# Altium PCB tscnew.PcbDoc
Units mm, origin at the board's own origin, x right, y up, seen from the top; angles counter-clockwise.
Board outline 151 x 86.38 mm, 2 copper layers (Top Layer, Bottom Layer); 69 components, 59 nets, 239 pads, 0 vias.
Unrouted connection lines stored in the file: 14.
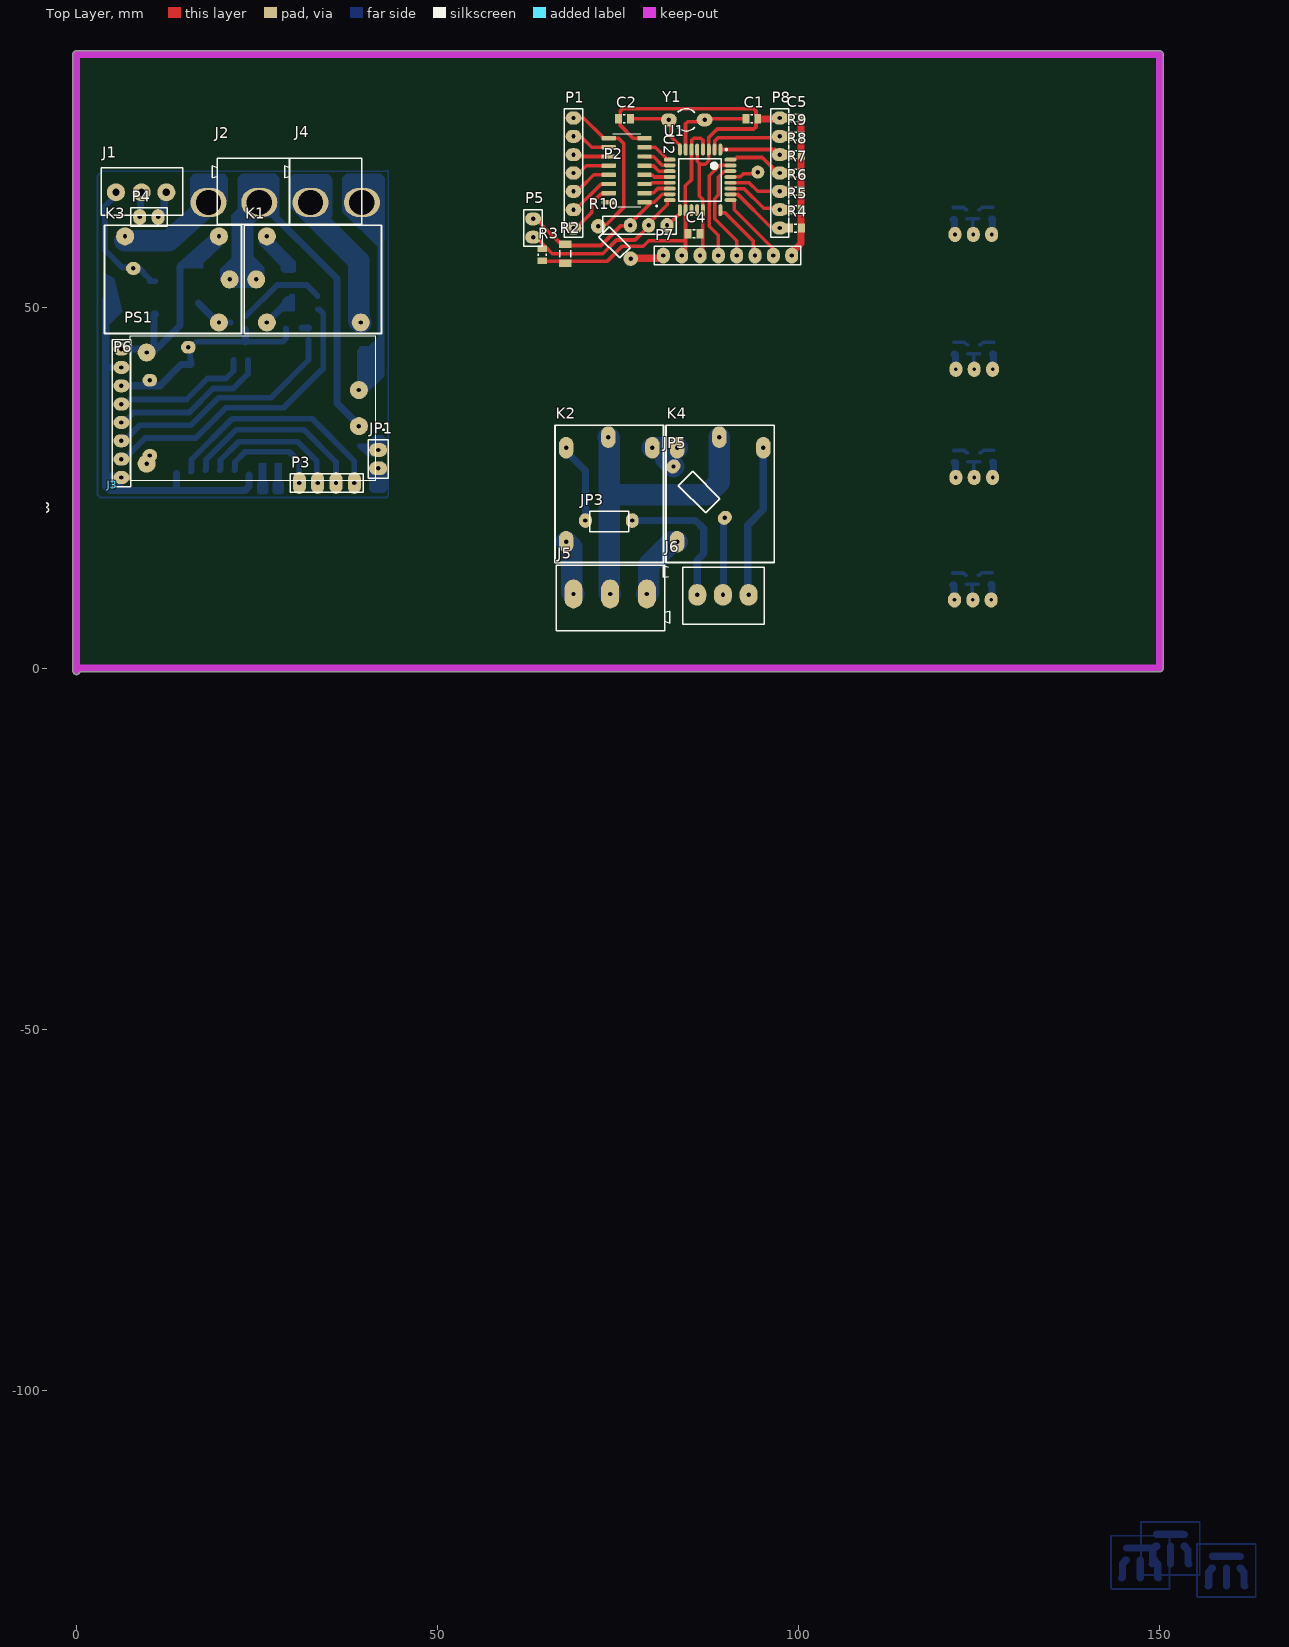
[diagram p0: Top Layer view]
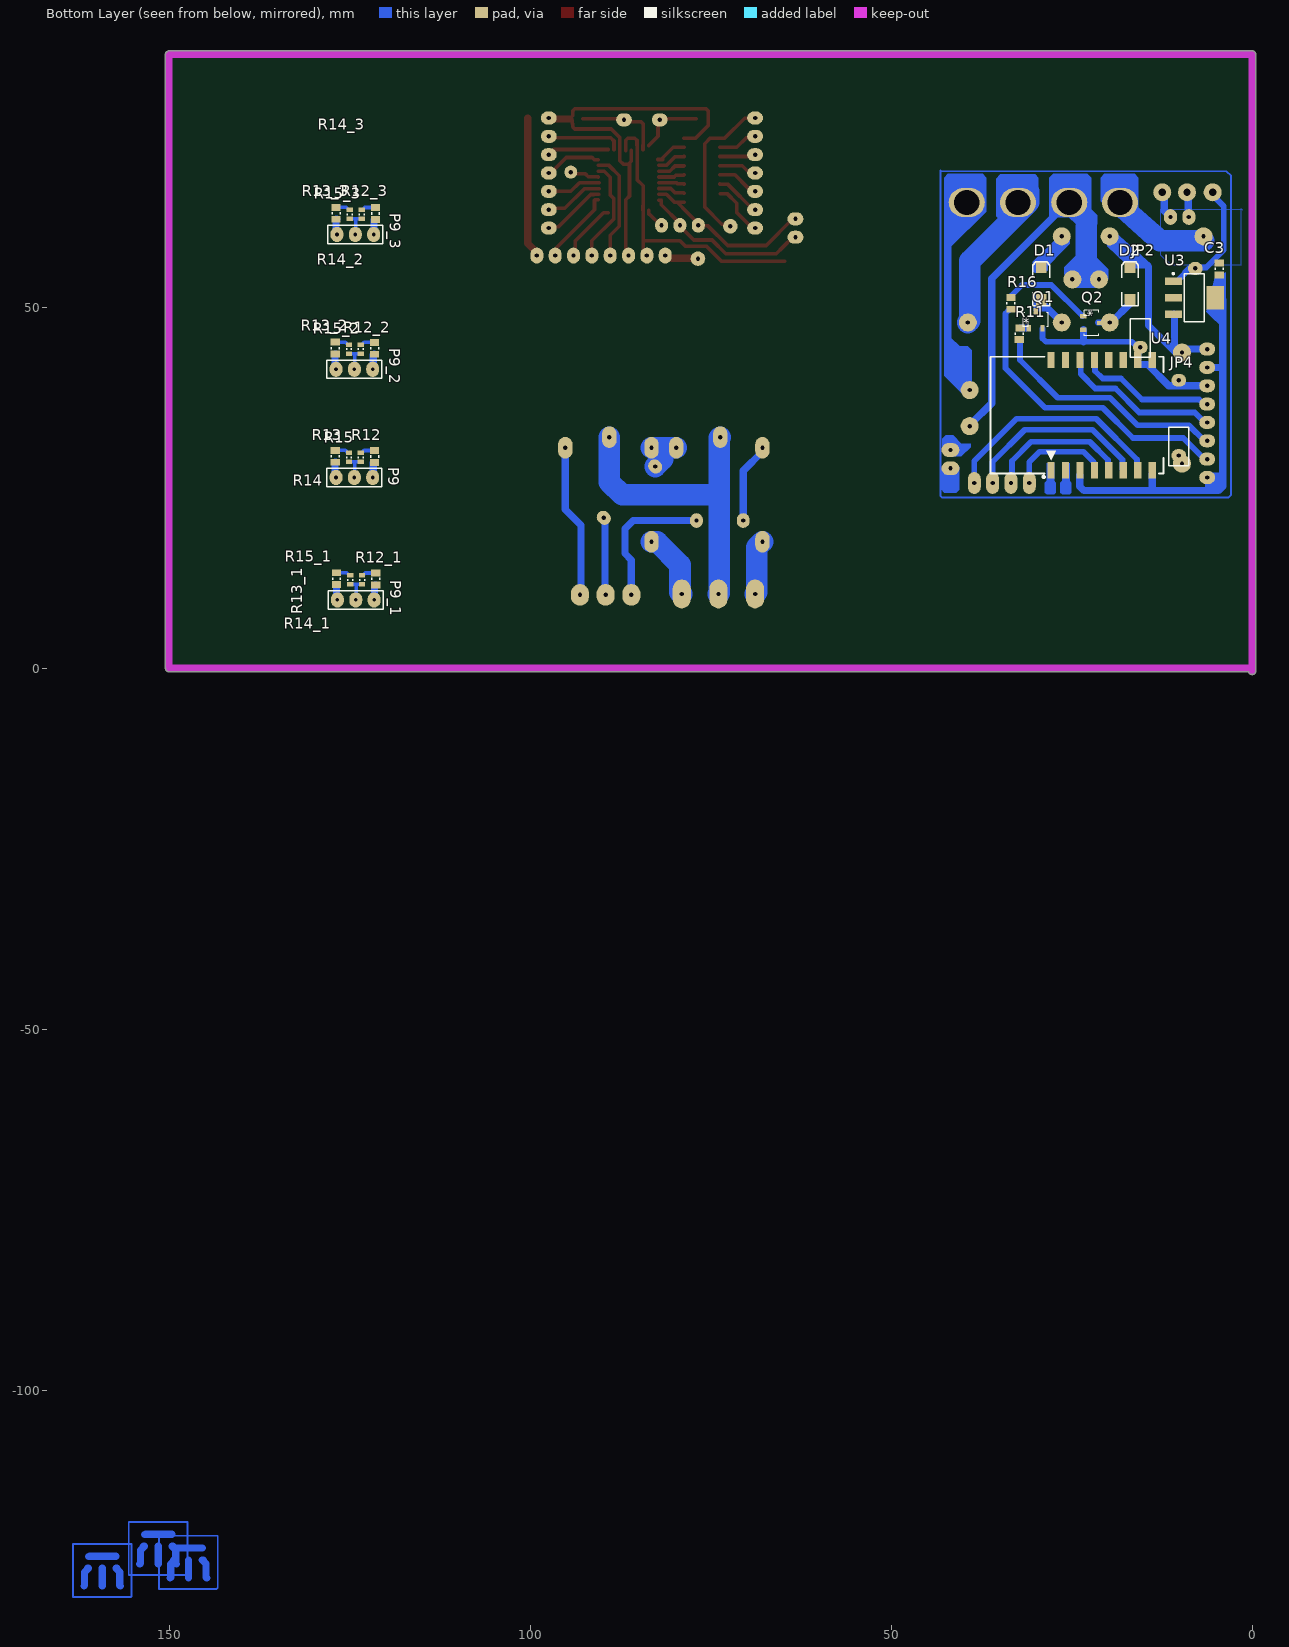
[diagram p1: Bottom Layer view, seen from below]
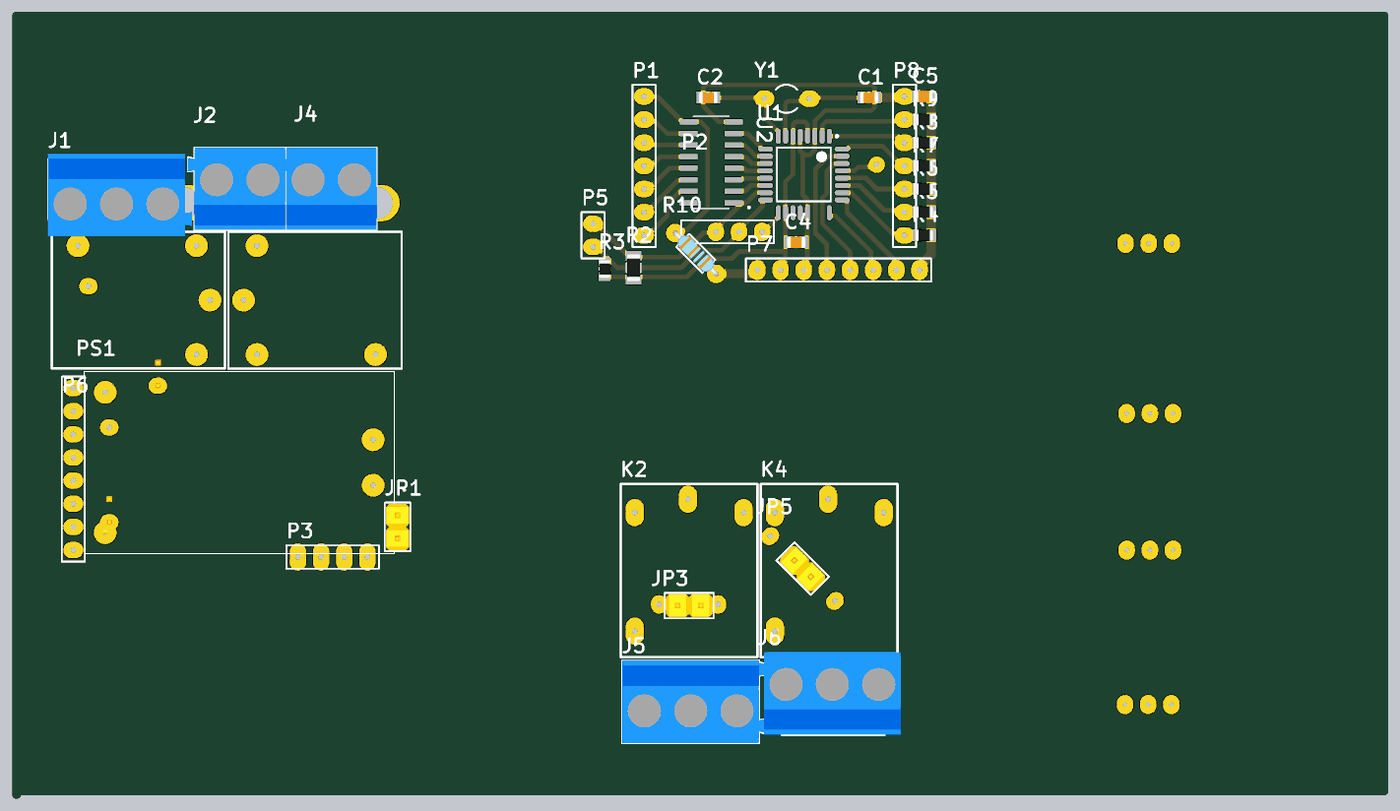
[diagram p2: 3D render of the assembled board from above, using the file's embedded part models]
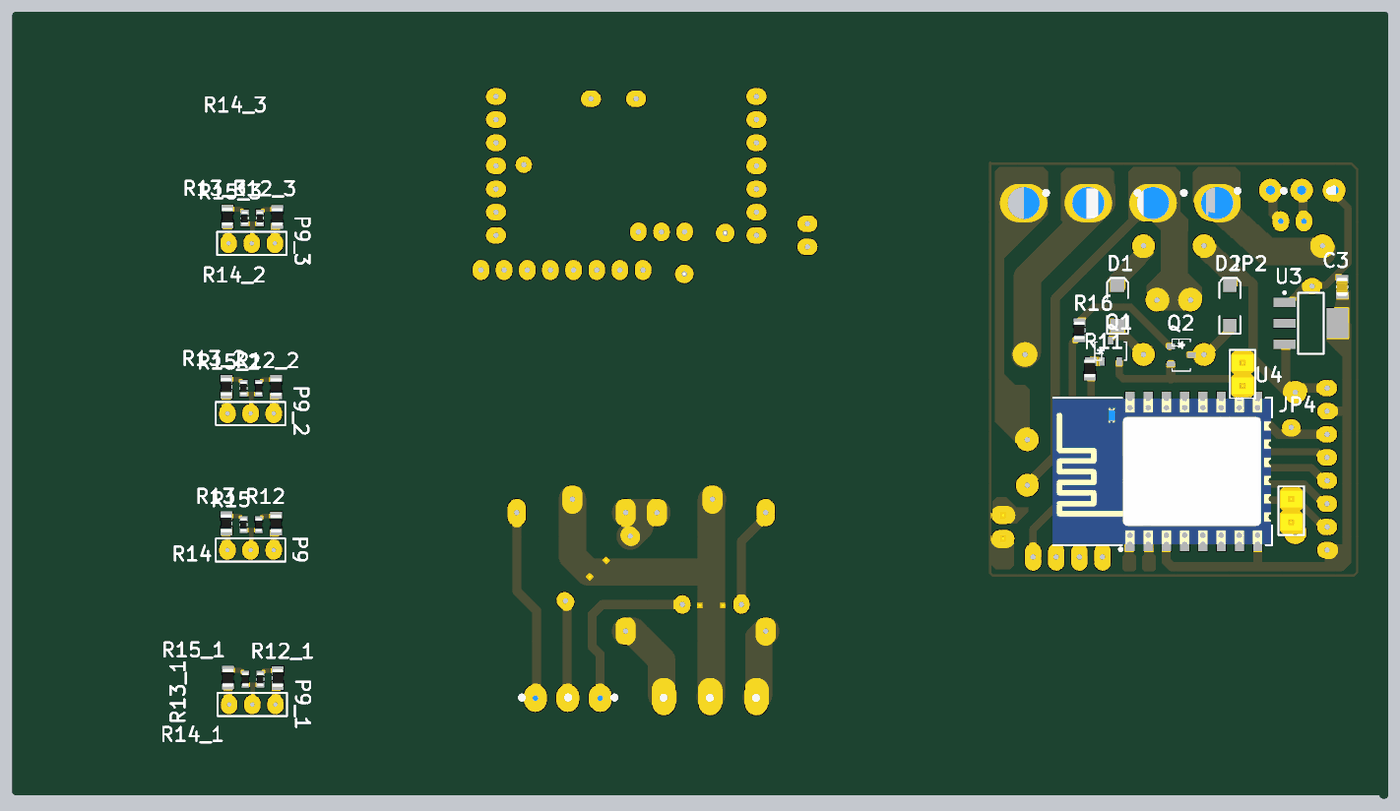
[diagram p3: 3D render of the assembled board from below, using the file's embedded part models]

## Layer stack, top to bottom
Top Solder: solder mask 0.0102, Solder Resist, Dk 3.5
Top Layer: signal copper 0.0356
Dielectric 1: dielectric 0.32, FR-4, Dk 4.8
Bottom Layer: signal copper 0.0356
Bottom Solder: solder mask 0.0102, Solder Resist, Dk 3.5

## Board outline
-0.5,-0.381 -0.5,85 cw(c0,85) 0,85.5 150,85.5 cw(c150,85) 150.5,85 150.5,0 cw(c150,0) 150,-0.5 0.486,-0.5 cw(c0,-0.381)

## Design rules (kind name [scope] priority, off if disabled: settings)
Clearance Clearance_1 [InPolygon] p1: gap=0.8 ignorepadtopadclearanceinfootprint=FALSE
Clearance [All] p2: gap=0.254 ignorepadtopadclearanceinfootprint=FALSE except(0: Arc-Hole Track-Hole SMDPad-Hole THPad-Hole Via-Hole Fill-Hole Poly-Hole Region-Hole Text-Hole)
PolygonConnect [All] p1: connectstyle=Relief reliefconductorwidth=0.254 reliefentries=4 polygonreliefangle="90 Angle" airgapwidth=0.254
RoomDefinition tscnew [InComponentClass('tscnew')] p1: confinementstyle=ConfineIn formatcopy=TRUE lockcomponents=FALSE outline 144.907,-4.953 247.904,-4.953 247.904,23.114 144.907,23.114
RoutingLayers [All] p1: top layer_v5=FALSE bottom layer_v5=TRUE
RoutingVias [All] p1: holewidth=0.711 width=2.5 viastyle="Through Hole" minholewidth=0.711 minwidth=1.27 maxholewidth=0.711 maxwidth=2
SolderMaskExpansion [All] p1: expansion=0.102 istentingtop=FALSE
Width [All] p1: maxlimit=3 minlimit=0.5 preferedwidth=1
29 further rules are at their usual default settings.

## Components (designator, comment, footprint, x,y, rotation, side; value= is the part's Value field where it differs from the comment)
C1 "=Value" "CAP 0805" 93.472,76.073 r180 top
C2 "=Value" "CAP 0805" 75.946,76.073 r0 top
C3 "=Value" "CAP 0805" 4.572,55.372 r90 bottom
C4 "=Value" "CAP 0805" 85.598,60.198 r0 top
C5 "=Value" "CAP 0805" 99.441,76.2 r180 top
D1 "D Tunnel1" 3.2X1.6X1.1 29.21,53.086 r90 bottom
D2 "D Tunnel1" 3.2X1.6X1.1 16.891,53.086 r90 bottom
J1 "TBlock-3" "KF300-3 PIN"#1 16.002,65.913 r270 top
J2 "TBlock-2" "KF300-2 PIN"#1 21.971,65.532 r90 top
J3 "TBlock-4" "KF300-4 PIN" 4.953,25.4 r180 top
J4 "TBlock-2" "KF300-2 PIN"#2 32.004,65.532 r90 top
J5 "TBlock-3" "KF300-3 PIN"#2 78.994,10.287 r270 top
J6 "TBlock-3" "KF300-3 PIN"#3 84.455,10.16 r90 top
JP1 "Jumper" "Header 2X1"#1 41.783,28.956 r90 top
JP2 "Jumper" "Header 2X1"#2 15.494,45.72 r90 bottom
JP3 "Jumper" "Header 2X1"#3 73.787,20.32 r0 top
JP4 "Jumper" "Header 2X1"#4 10.16,30.734 r90 bottom
JP5 "Jumper" "Header 2X1"#5 86.233,24.384 r315 top
K1 "Relay-12vDC" Relays#1 23.241,61.341 r270 top
K2 "Relay-12vDC" Relays#2 81.28,33.655 r180 top
K3 "Relay-12vDC" Relays#1 22.86,46.355 r90 top
K4 "Relay-12vDC" Relays#2 96.647,33.655 r180 top
P1 "Header 7" HDR1X7 68.834,76.2 r270 top
P2 "Header 4" HDR1X4#1 81.788,61.341 r180 top
P3 "Header 4" HDR1X4#2 38.481,25.654 r180 top
P4 "Header 2" HDR1X2 8.763,62.492 r0 top
P5 "Header 2" HDR1X2 63.246,62.23 r270 top
P6 "Header 8" HDR1X8 6.223,26.416 r90 top
P7 "Header 8" HDR1X8 99.06,57.15 r180 top
P8 "Header 7" HDR1X7 97.409,60.96 r90 top
P9 "Header 3" HDR1X3 126.873,26.416 r180 bottom
P9_1 "Header 3" HDR1X3 126.682,9.461 r180 bottom (schematic designator P9)
P9_2 "Header 3" HDR1X3 126.873,41.402 r180 bottom (schematic designator P9)
P9_3 "Header 3" HDR1X3 126.746,60.071 r180 bottom (schematic designator P9)
PS1 "HLK-PM01" HLKPM01 39.116,33.528 r180 top
Q1 "MMBT3904-TP" SOT23-3 31.242,48.26 r180 bottom
Q2 "MMBT3904-TP" SOT23-3 22.218,49.083 r270 bottom
R2 "10K" "RES 1206 (3216X08L)" 67.691,57.404 r90 top
R3 "10K" "RES 0805 (2012X06L)"#1 64.516,57.277 r90 top
R4 "10K" "RES 0805 (2012X06L)"#1 99.568,60.96 r180 top
R5 "10K" "RES 0805 (2012X06L)"#1 99.568,63.5 r180 top
R6 "10K" "RES 0805 (2012X06L)"#1 99.568,66.04 r180 top
R7 "10K" "RES 0805 (2012X06L)"#1 99.568,68.58 r180 top
R8 "10K" "RES 0805 (2012X06L)"#1 99.568,71.12 r180 top
R9 "10K" "RES 0805 (2012X06L)"#1 99.568,73.66 r180 top
R10 "10K" Res-(1/4) 74.508,58.969 r135 top
R11 "10K" "RES 0805 (2012X06L)"#2 32.258,46.355 r90 bottom
R12 "10K" "RES 0805 (2012X06L)"#1 121.539,29.337 r90 bottom
R12_1 "10K" "RES 0805 (2012X06L)"#1 121.349,12.383 r90 bottom (schematic designator R12)
R12_2 "10K" "RES 0805 (2012X06L)"#1 121.539,44.323 r90 bottom (schematic designator R12)
R12_3 "10K" "RES 0805 (2012X06L)"#1 121.412,62.992 r90 bottom (schematic designator R12)
R13 "10K" "RES 0805 (2012X06L)"#1 127,29.337 r270 bottom
R13_1 "10K" "RES 0805 (2012X06L)"#1 126.809,12.383 r270 bottom (schematic designator R13)
R13_2 "10K" "RES 0805 (2012X06L)"#1 127,44.323 r270 bottom (schematic designator R13)
R13_3 "10K" "RES 0805 (2012X06L)"#1 126.873,62.992 r270 bottom (schematic designator R13)
R14 "10K" "RES 0603 (1608X06L)" 123.444,29.21 r90 bottom
R14_1 "10K" "RES 0603 (1608X06L)" 123.253,12.255 r90 bottom (schematic designator R14)
R14_2 "10K" "RES 0603 (1608X06L)" 123.444,44.196 r90 bottom (schematic designator R14)
R14_3 "10K" "RES 0603 (1608X06L)" 123.317,62.865 r90 bottom (schematic designator R14)
R15 "10K" "RES 0603 (1608X06L)" 125.095,29.21 r90 bottom
R15_1 "10K" "RES 0603 (1608X06L)" 124.904,12.255 r90 bottom (schematic designator R15)
R15_2 "10K" "RES 0603 (1608X06L)" 125.095,44.196 r90 bottom (schematic designator R15)
R15_3 "10K" "RES 0603 (1608X06L)" 124.968,62.865 r90 bottom (schematic designator R15)
R16 "10K" "RES 0805 (2012X06L)"#1 33.401,50.546 r90 bottom
U1 "ATmega8-16AC" 32A_N 86.369,67.634 r270 top
U2 "ULN2003ADRG4" SOIC127P600X175-16N 76.2,68.961 r180 top
U3 "LM1117MP-3.3" MP04A_N 8.001,51.308 r180 bottom
U4 "ESP_12_E" ESP_12_E 27.845,27.047 r90 bottom
Y1 "XTAL" R38 84.455,75.946 r90 top

## Footprints (in the part's own frame and the unit in brackets; to place one, negate y for a bottom-side part, rotate by r counter-clockwise, add the part's x,y. Pads: shape width x height; smd on the part's side, far side on the other; paste and mask are expansions set on the pad)
3.2X1.6X1.1 [mm] "SMT LED; 2 Flat Leads"
  rect 1.5x1.5 smd: 1(-2.032,0) 2(2.413,0)
  silkscreen extent -2.9,-1.15 3.2,1.15
32A_N [mm] "Thin QFP, 32-Leads, Body 7x7mm, Pitch 0.8mm, IPC Medium Density"
  oval 1.65x0.55 smd: 1(-4.2,2.8) 2(-4.2,2) 3(-4.2,1.2) 4(-4.2,0.4) 5(-4.2,-0.4) 6(-4.2,-1.2) 7(-4.2,-2) 8(-4.2,-2.8) 17(4.2,-2.8) 18(4.2,-2) 19(4.2,-1.2) 20(4.2,-0.4) 21(4.2,0.4) 24(4.2,2.8)
  oval 0.55x1.65 smd: 9(-2.8,-4.2) 10(-2,-4.2) 11(-1.2,-4.2) 12(-0.4,-4.2) 13(0.4,-4.2) 14(1.2,-4.2) 15(2,-4.2) 16(2.8,-4.2) 25(2.8,4.2) 26(2,4.2) 27(1.2,4.2) 28(0.4,4.2) 29(-0.4,4.2) 30(-1.2,4.2) 31(-2,4.2) 32(-2.8,4.2)
  silkscreen extent -4.32,-2.95 2.95,3.75, body extent -3.5,-3.5 3.5,3.5, height 1.2
"CAP 0805" [mm]
  rect 0.95x1.3 smd: 1(-0.889,0) 2(0.761,0)
  silkscreen extent -0.21,-0.55 0.09,0.55, body extent -1.08,-0.63 0.95,0.63, height 0.65
ESP_12_E [mm] "ESP-12 Wi-Fi Module by AI-Thinker"
  rect 2.25x1 smd: 1(0.375,0) 2(0.375,-2) 3(0.375,-4) 4(0.375,-6) 5(0.375,-8) 6(0.375,-10) 7(0.375,-12) 8(0.375,-14) 15(15.625,-14) 16(15.625,-12) 17(15.625,-10) 18(15.625,-8) 19(15.625,-6) 20(15.625,-4) 21(15.625,-2) 22(15.625,0)
  silkscreen extent -0.7,-15.57 16.08,8.37, body extent 0,-15.49 16,8.51, height 2.75
HDR1X2 [mm] "Connector; Header; 2 Position"
  oval 1.8x2.2 hole 0.6: 1(0,0) 2(2.54,0)
  silkscreen extent -1.27,-1.27 3.81,1.27
HDR1X3 [mm] "Connector; Header; 3 Position"
  oval 1.8x2.1 hole 0.5: 1(0,0) 2(2.54,0) 3(5.08,0)
  silkscreen extent -1.27,-1.27 6.35,1.27
HDR1X4#1 [mm] "Connector; Header; 4 Position"
  oval 1.8x2.032 hole 0.6: 1(0,0) 2(2.54,0) 3(5.08,0)
  round 1.8 hole 0.6: 4(-12.573,-7.366)
  silkscreen extent -1.27,-1.27 8.89,1.27
HDR1X4#2 [mm] "Connector; Header; 4 Position"
  oval 1.8x3 hole 0.6: 1(0,0) 2(2.54,0) 3(5.08,0) 4(7.62,0)
  silkscreen extent -1.27,-1.27 8.89,1.27
HDR1X7 [mm] "Connector; Header; 7 Position"
  oval 1.8x2.2 hole 0.6: 1(0,0) 2(2.54,0) 3(5.08,0) 4(7.62,0) 5(10.16,0) 6(12.7,0) 7(15.24,0)
  silkscreen extent -1.27,-1.27 16.51,1.27
HDR1X8 [mm] "Connector; Header; 8 Position"
  oval 1.8x2.2 hole 0.6: 1(0,0) 2(2.54,0) 3(5.08,0) 4(7.62,0) 5(10.16,0) 6(12.7,0) 7(15.24,0) 8(17.78,0)
  silkscreen extent -1.27,-1.27 19.05,1.27
"Header 2X1"#1 [mm]
  oval 1.9x2.5 hole 0.6: 1(-1.27,0) 2(1.27,0)
  silkscreen extent -2.67,-1.4 2.67,1.4, body extent -2.54,-1.27 2.54,1.27, height 9.5
"Header 2X1"#2 [mm]
  oval 1.778x2.032 hole 0.6: 1(-1.27,0) 2(9.652,-7.62)
  silkscreen extent -2.67,-1.4 2.67,1.4, body extent -2.54,-1.27 2.54,1.27, height 9.5
"Header 2X1"#3 [mm]
  oval 1.778x2.032 hole 0.6: 1(-3.302,0.127) 2(3.175,0.127)
  silkscreen extent -2.67,-1.4 2.67,1.4, body extent -2.54,-1.27 2.54,1.27, height 9.5
"Header 2X1"#4 [mm]
  oval 1.778x2.032 hole 0.6: 1(-1.27,0) 2(9.144,0)
  silkscreen extent -2.67,-1.4 2.67,1.4, body extent -2.54,-1.27 2.54,1.27, height 9.5
"Header 2X1"#5 [mm]
  oval 1.778x2.032 hole 0.6: 1(-5.029,0) 2(5.029,0)
  silkscreen extent -2.67,-1.4 2.67,1.4, body extent -2.54,-1.27 2.54,1.27, height 9.5
HLKPM01 [mm]
  round 2.5 hole 0.6: 1(0,0) 2(0,-5) 3(29.4,5.2) 4(29.4,-10.2)
  silkscreen extent -3.5,-12.5 31.7,7.5
"KF300-2 PIN"#1 [mm]
  oval 4x5 hole 3.5: 1(-1.032,3.683) 2(-1.032,-3.35)
  silkscreen extent -4.06,-7.49 5.08,3.18, body extent -3.99,-7.5 5.08,3.24, height 12.52
"KF300-2 PIN"#2 [mm]
  oval 4x5 hole 3.5: 1(-1.032,-0.417) 2(-1.032,-7.517)
  silkscreen extent -4.06,-7.49 5.08,3.18, body extent -3.99,-7.5 5.08,3.24, height 12.52
"KF300-3 PIN"#1 [mm]
  round 2.5 hole 1: 1(0,-3.556) 2(0,-6.985) 3(0,-10.541)
  silkscreen extent -3.43,-12.57 3.18,-1.27, body extent -4,-12.57 5.07,3.25, height 12.78
"KF300-3 PIN"#2 [mm]
  oval 4x2.5 hole 0.6: 1(0,0) 2(0,-5.08) 3(0,-10.16)
  silkscreen extent -4.06,-12.57 5.08,3.18, body extent -4,-12.57 5.07,3.25, height 12.78
"KF300-3 PIN"#3 [mm]
  oval 3x2.5 hole 0.6: 1(0,-1.524) 2(0,-5.08) 3(0,-8.636)
  silkscreen extent -4.06,-10.79 4.05,3.18, body extent -4,-12.57 5.07,3.25, height 12.78
"KF300-4 PIN" [mm]
MP04A_N [mm] "SOT223, 4-Leads, Body 6.5x3.5mm, Pitch 2.3mm, Lead Span 7mm, IPC Medium Density"
  rect 2.4x1 smd: 1(-2.9,2.3) 2(-2.9,0) 3(-2.9,-2.3)
  rect 2.4x3.3 smd: 4(2.9,0)
  silkscreen extent -3.03,-3.35 1.4,3.47, body extent -1.85,-3.35 1.85,3.35, height 1.8
R38 [mm] "Crystal, Thru-Hole; 2 Leads; Body 3.1 x 8.2 mm (Dia.xH)"
  oval 1.8x2.2 hole 0.6: 1(0,2.413) 2(0,-2.54)
  silkscreen extent -1.55,-1.19 1.55,1.17
Relays#1 [mm]
  round 2.5 hole 0.6: 1(7.493,1.651) 3(13.462,16.129) 4(1.524,3.127) 5(13.462,3.127)
  silkscreen extent 0,0 15,19
Relays#2 [mm]
  oval 2x3 hole 0.6: 1(7.62,1.651) 3(13.462,16.129) 4(1.524,3.127) 5(13.462,3.127)
  silkscreen extent 0,0 15,19
"RES 0603 (1608X06L)" [mm] "Chip Resistor, 2-Leads, Body 1.6x0.8mm, IPC High Density _ (0.063W)"
  rect 0.6x0.85 smd: 1(-0.635,0) 2(0.609,0)
  silkscreen extent -0.11,-0.33 0.09,0.33, body extent -0.77,-0.38 0.75,0.38, height 0.45
"RES 0805 (2012X06L)"#1 [mm] "Chip Resistor, 2-Leads, Body 2.0x1.3mm, IPC High Density _ (0.100 W)"
  rect 0.95x1.3 smd: 1(-0.838,0) 2(0.812,0)
  silkscreen extent -0.16,-0.55 0.14,0.55, body extent -1.03,-0.63 1,0.64, height 0.6
"RES 0805 (2012X06L)"#2 [mm] "Chip Resistor, 2-Leads, Body 2.0x1.3mm, IPC High Density _ (0.100 W)"
  rect 0.95x1.3 smd: 1(-0.838,0) 2(0.762,-0.127)
  silkscreen extent -0.16,-0.55 0.14,0.55, body extent -1.03,-0.63 1,0.64, height 0.6
"RES 1206 (3216X08L)" [mm] "Chip Resistor, 2-Leads, Body 3.2x1.6mm, IPC High Density _ (0.125 W)"
  rect 1.05x1.7 smd: 1(-1.295,0) 2(1.301,0)
  silkscreen extent -0.5,-0.75 0.5,0.75, body extent -1.52,-0.76 1.53,0.76, height 0.6
Res-(1/4) [mil]
  round 80 hole 23.62: 1(-125,0) 2(125,0)
  silkscreen extent -80,-40 80,40, body extent -135,-36 135,36, height 115
SOIC127P600X175-16N [mm]
  rrect25% 1.97x0.6 smd: 1(-2.475,4.445) 2(-2.475,3.175) 3(-2.475,1.905) 4(-2.475,0.635) 5(-2.475,-0.635) 6(-2.475,-1.905) 7(-2.475,-3.175) 8(-2.475,-4.445) 9(2.475,-4.445) 10(2.475,-3.175) 11(2.475,-1.905) 12(2.475,-0.635) 13(2.475,0.635) 14(2.475,1.905) 15(2.475,3.175) 16(2.475,4.445)
  silkscreen extent -4.25,-5.06 1.95,5.06
SOT23-3 [mm]
  rect 0.6x0.9 smd: 1(0.32,-1.15) 2(2.22,-1.15) 3(1.27,1.15)
  silkscreen extent -0.48,-1 3.02,1

## Part data
C1 C2 C3 C4 C5: library part Capacitor, "Capacitor"
D1 D2: "Tunnel Diode - RLC Model", LatestRevisionDate=17-Jul-2002, LatestRevisionNote="Re-released for DXP Platform.", PackageDescription="SM LED; 2 Flat Leads", PackageReference=3.2X1.6X1.1, PackageVersion=Feb-2002, Published=8-Jun-2000, Publisher="Altium Limited"
K1 K2 K3 K4: library part Relay-05vDC, "Relay-05vDC-240AC 5A", ComponentLinkURL=www.picpars.com, Designer="Seyed Mohsen Ghasemain"
P1 P8: "Header, 7-Pin", LatestRevisionDate=17-Jul-2002, LatestRevisionNote="Re-released for DXP Platform.", Publisher="Altium Limited"
P2 P3: "Header, 4-Pin", LatestRevisionDate=17-Jul-2002, LatestRevisionNote="Re-released for DXP Platform.", Publisher="Altium Limited"
P4 P5: "Header, 2-Pin", LatestRevisionDate=17-Jul-2002, LatestRevisionNote="Re-released for DXP Platform.", Publisher="Altium Limited"
P6 P7: "Header, 8-Pin", LatestRevisionDate=17-Jul-2002, LatestRevisionNote="Re-released for DXP Platform.", Publisher="Altium Limited"
P9 P9_1 P9_2 P9_3: "Header, 3-Pin", LatestRevisionDate=17-Jul-2002, LatestRevisionNote="Re-released for DXP Platform.", Publisher="Altium Limited"
PS1: "<b>Ultra-compact power module</b><p> Source: <a href=\"https://datasheet.lcsc.com/szlcsc/1906201102_HI-LINK-HLK-PM03_C209904.pdf\"> Datasheet </a>", Package="Package Analog Devices", Availability=Unavailable, MF=Hi-link, MP=hlk-pm01, Price=None, SnapEDA_Link=https://www.snapeda.com/parts/hlk-pm01/Hi-link/view-part/2875605/?ref=snap
Q1 Q2: "Bipolar _BJT_ Transistor NPN 40V 200mA 300MHz 350mW Surface Mount SOT-23", Package="SOT-23 Micro Commercial", Availability=Unavailable, MF="Micro Commercial", MP=MMBT3904-TP, Price=None, SnapEDA_Link=https://www.snapeda.com/parts/MMBT3904-TP/Micro%20Commercial/view-part/805928/?ref=snap
R2 R3 R4 R5 R6 R7 R8 R9 R10 R11 R12 R12_1 R12_2 R12_3 R13 R13_1 R13_2 R13_3 R14 R14_1 R14_2 R14_3 R15 R15_1 R15_2 R15_3 R16: library part Resistor, "Resistor", Power="1/4 W", Tolerance=5%
U1: "8-Bit AVR Microcontroller with 8K Bytes of In-System Programmable Flash Memory", Supplier Part Number 1=ATMEGA8-16AC-ND, Code_JEDEC=MS-026-ABA, ComponentLink1Description=Datasheet, ComponentLink1URL=http://www.atmel.com/dyn/resources/prod_documents/doc2486.pdf, ComponentLink2Description="Atmel.com Home", ComponentLink2URL=http://www.atmel.com, DatasheetVersion=2486H-AVR-09/02, LatestRevisionDate=16-Oct-2006, LatestRevisionNote="IPC-7351 Footprint Added.", PackageDescription="32-Lead, 7x7x1.0 mm Body, 0.8mm Lead Pitch, Thin Profile Plastic Quad Flat Package (TQFP)", PackageReference=32A, PackageVersion="revB, Oct-2001", Published=17-Sep-2003, Publisher="Altium Limited", Supplier 1=Digi-Key, Supplier 2=Mouser, Supplier Part Number 2=556-ATMEGA8-16AC
U2: "50-V, 7-ch darlington transistor array, -20C to 70C 16-SOIC -40 to 70", Package=None, Availability=Unavailable, MP=ULN2003ADRG4, Price=None
U3: "800mA Low-Dropout Linear Regulator", DigiKeyPartNumber=LM1117MP-3.3CT-ND, Manufacturer="National Semiconductor", PackageTopMarking=XYTT*N05A, PowerWise=N, Code_IPC=SOT223-4, Code_JEDEC=TO-261-AA, ComponentLink1Description="LM1117 Datasheet", ComponentLink1URL=http://www.national.com/ds/LM/LM1117.pdf, ComponentLink2Description="LM1117 Web Page", ComponentLink2URL=http://www.national.com/pf/LM/LM1117.html, ComponentLink3Description="MP04A Package Page", ComponentLink3URL=http://www.national.com/packaging/folders/mp04a.html, CompType="LDO IC", DatasheetVersion=Apr-2006, PackageDescription="Molded SOT-223, 6.50 x 3.56 x 1.6mm Body, 4 Lead, 2.3mm Pitch", PackageReference=MP04A, PackageVersion="revB, Apr-2003", PartNumber=LM1117MP-3.3, PinCount=4, Published=4-Dec-2008, Publisher="Altium Limited", RoHS=O
U4: "ESP-12 Wi-Fi Module by AI-Thinker", IC=ESP8266-EX, Vendor=Ai-thinker
Y1: "Crystal Oscillator", LatestRevisionDate=17-Jul-2002, LatestRevisionNote="Re-released for DXP Platform.", PackageDescription="Crystal, Thru-Hole; 2 Leads; Body 3.1 x 8.2 mm (Dia.xH)", PackageReference=R38, Published=8-Jun-2000, Publisher="Altium Limited"

## Nets (pads, with @x,y where several pads share a name; then routed paths per layer and width w, separated by ;. In a path a pad name is that pad's centre, name@x,y a point inside that pad or via, vN(x,y) a via of type N, cw(c..) or ccw(c..) an arc to the next point about the centre after c; other vN are vias at no path point)
btn: U4.18
faz: J2.2 K1.1 K3.1 PS1.1 | length 47.1
  Bottom Layer w1: 22.422,61.661 22.422,62.511 ; 22.479,61.722 24.43,63.673 24.43,63.884 25.024,64.478 25.565,64.478 36.068,53.975 36.068,36.703 38.989,33.782 PS1.1@39.116,33.782
  Bottom Layer w3: 22.987,55.626 22.987,61.095
GND: C1.1 C2.1 C3.2 C4.2 C5.2 J1.3 JP2.1 JP2.2 JP4.1 JP4.2 P6.6 P7.6 P8.7 PS1.3 Q1.2 Q2.2 U1.3 U1.5 U1.21 U2.8 U3.1 U4.15 U4.16 | length 105.1
  Top Layer w0.5: U2.8 77.089,73.406 75.333,75.162 75.333,76.073 75.333,77.177 75.626,77.47 93.814,77.47 94.107,77.177 94.107,76.502 94.361,76.248 C1.1 94.136,75.848 94.136,75.409 94.107,75.38 94.107,74.969 93.814,74.676 88.751,74.676 87.569,73.494 U1.3 87.569,70.297 87.065,69.793 86.389,69.793 85.969,70.213 U1.5@85.969,71.707 ; P7.6@86.233,57.15 86.736,57.653 86.736,58.204 86.741,58.209 86.741,62.554 86.748,62.561 86.748,62.828 86.759,62.839 86.759,63.424 U1.21 86.759,63.444 86.759,64.879 86.233,65.405 86.233,69.949
  Top Layer w1: C1.1@94.488,76.073 97.282,76.073 P8.7
  Bottom Layer w0.8: J1.3 5.461,65.496 3.937,63.972 3.937,57.912 6.35,55.499 7.944,55.499 8.011,55.432 8.692,55.432 9.331,54.793 9.331,54.677 10.101,53.907 10.101,53.708 10.201,53.608 U3.1 ; U4.16 15.745,42.772 15.745,44.32 16.637,45.212 23.368,45.212 28.566,45.212 29.035,45.681 Q1.2@29.035,47.06
  Bottom Layer w1: P6.6 11.557,39.116 14.488,42.047 15.845,42.047 U4.16@15.845,42.428 ; PS1.3@9.582,28.194 PS1.3 ; 23.368,45.212 Q2.2
i13: P8.6 R9.2 U1.2 | length 10.4
  Top Layer w0.5: U1.2 88.379,71.844 88.379,73.012 88.841,73.474 97.328,73.474 P8.6@97.387,73.533
i14: P8.5 R8.2 U1.1 | length 8.5
  Top Layer w0.5: U1.1 96.695,71.834 P8.5
i15: P8.4 R7.2 U1.32 | length 7.9
  Top Layer w0.5: U1.32 91.132,70.434 91.437,70.739 94.996,70.739 97.155,68.58 P8.4
i16: P8.3 R6.2 U1.28 | length 7.5
  Top Layer w0.5: U1.28@90.457,67.244 91.142,67.244 91.154,67.255 93.146,67.255 94.361,66.04 P8.3
i17: P8.2 R5.2 U1.27 | length 8.2
  Top Layer w0.5: U1.27@90.429,66.424 91.164,66.424 91.167,66.421 92.456,66.421 95.182,63.695 97.214,63.695 P8.2
i18: P8.1 R4.2 U1.26 | length 8.9
  Top Layer w0.5: U1.26@90.467,65.644 90.486,65.624 91.164,65.624 91.175,65.613 91.613,65.613 96.071,61.155 97.214,61.155 P8.1
NetC1_2: C1.2 U1.7 Y1.2 | length 12.2
  Top Layer w0.5: U1.7 84.359,71.844 84.359,72.429 84.348,72.44 84.348,75.399 84.641,75.692 86.273,75.692 86.527,75.946 Y1.2 87.122,76.073 C1.2
NetC2_2: C2.2 U1.8 Y1.1 | length 8.9
  Top Layer w0.5: C2.2@76.961,76.073 81.193,76.073 81.574,75.692 Y1.1@82.042,75.692 ; Y1.1@82.042,75.438 82.281,75.199 82.281,73.658 83.53,72.409 U1.8@83.546,72.394
NetD1_1: D1.1 K1.5 Q1.3 | length 4.4
  Bottom Layer w1: K1.5 28.96,50.471 28.96,50.804 D1.1
NetD2_1: D2.1 K3.4 Q2.3 | length 5.6
  Bottom Layer w0.8: K3.4@19.79,47.94 19.856,47.874 21.068,47.874 Q2.3@21.379,47.874
  Bottom Layer w1: D2.1@16.891,50.546 19.558,47.879 K3.4
NetJ5_1: J5.1 K4.3 | length 9.4
  Bottom Layer w3: J5.1 79.244,10.537 79.244,14.347 82.423,17.526 K4.3
NetJ5_2: J5.2 K2.1 K4.1 | length 44
  Bottom Layer w3: K2.1 73.787,31.877 73.787,24.003 ; J5.2 73.787,10.414 73.787,24.003 ; K4.1 89.027,25.781 87.249,24.003 73.787,24.003
NetJ5_3: J5.3 K2.3 | length 7.7
  Bottom Layer w3: K2.3 68.584,16.76 68.584,10.537 J5.3
NetJ6_1: J6.1 JP3.2 | length 19.9
  Bottom Layer w1: JP3.2 85.725,20.447 86.868,19.304 86.868,15.875 85.979,14.986 J6.1
NetJ6_2: J6.2 JP5.2 | length 10.8
  Bottom Layer w1: J6.2 89.617,10.242 89.617,20.656 JP5.2
NetJ6_3: J6.3 K4.4 | length 21
  Bottom Layer w1: J6.3@92.964,10.414 92.964,19.812 95.123,21.971 K4.4
NetJP3_1: JP3.1 K2.5 | length 11.2
  Bottom Layer w1: K2.5 67.818,30.028 70.485,27.361 JP3.1
NetJP5_1: JP5.1 K2.4 K4.5 | length 4.9
  Bottom Layer w3: K2.4 K4.5 ; 81.637,28.98 JP5.1
NetP2_1: P2.1 U1.17 | length 3
  Top Layer w0.5: P2.1 81.915,61.341 83.448,62.874 83.546,62.874 83.569,62.898 U1.17
NetP3_1: P3.1 U4.7 | length 33.2
  Bottom Layer w0.8: U4.7@15.875,27.217 15.945,27.287 15.945,28.899 21.59,34.544 32.639,34.544 38.481,28.702 P3.1@38.481,24.535
NetP3_2: P3.2 U4.6 | length 26
  Bottom Layer w0.8: U4.6 17.945,27.522 17.945,28.867 22.098,33.02 31.496,33.02 35.941,28.575 P3.2
NetP3_3: P3.3 U4.5 | length 20.2
  Bottom Layer w0.8: U4.5 19.945,27.522 19.945,28.835 22.479,31.369 30.607,31.369 33.274,28.702 P3.3@33.274,25.396
NetP3_4: P3.4 U4.4 | length 14.9
  Bottom Layer w0.8: U4.4 21.945,27.522 21.945,28.549 23.368,29.972 29.464,29.972 30.861,28.575 P3.4@30.861,24.958
NetP9_1: P9.1 R13.2 | length 2.3
  Bottom Layer w1: P9.1 127,26.543 R13.2@127,28.5 ; R13.2@126.873,28.5 126.898,28.525 R13.2
NetP9_2: P9.2 R14.1 R15.1 | length 3.8
  Bottom Layer w0.5: R14.1 124.269,28.575 ; P9.2 124.269,26.479 124.269,28.575 ; R15.1 124.269,28.575
NetP9_3: P9.3 R12.1 | length 2.2
  Bottom Layer w1: R12.1 121.577,28.499 R12.1@121.602,28.474 ; R12.1@121.73,28.474 121.73,26.479 P9.3
NetQ1_1: Q1.1 R11.2 | length 0.9
  Bottom Layer w1: 31.242,47.11 32.124,47.11 R11.2
NetQ2_1: Q2.1 R16.2 | length 12.3
  Bottom Layer w0.8: Q2.1@23.49,48.763 27.813,53.086 31.877,53.086 R16.2@33.401,51.562
NetR12_2: R12.2 R14.2 | length 2
  Bottom Layer w0.5: R12.2 122.99,30.149 123.319,29.819 R14.2
NetR13_1: R13.1 R15.2 | length 2.1
  Bottom Layer w0.5: R15.2 125.22,29.819 125.576,30.175 R13.1
nol: J4.2 PS1.2 | length 29.4
  Bottom Layer w1: J4.2@39.497,65.913 42.164,63.246 42.164,40.687 PS1.2@40.005,38.528
o1: P2.3 P5.1 P6.2 R2.2 R16.1 U1.15 U2.1 | length 65.9
  Top Layer w0.5: P5.1 63.627,62.23 67.31,58.547 68.707,58.547 72.644,58.547 75.351,61.254 76.621,61.254 P2.3 76.708,61.595 78.359,63.246 U2.1@79.495,64.381 ; U2.1 79.495,64.516 80.01,64.516 81.118,65.624 82.159,65.624 U1.15
  Bottom Layer w0.8: P6.2@6.246,29.15 6.798,29.15 9.525,31.877 16.51,31.877 20.701,36.068 28.702,36.068 34.163,41.529 34.163,49.121 33.576,49.708 R16.1
o2: P2.2 P5.2 P6.3 R3.2 R11.1 U1.16 | length 56.9
  Top Layer w0.5: P5.2 63.627,59.69 64.974,58.343 65.913,57.404 72.898,57.404 74.803,59.309 77.343,59.309 79.248,61.214 79.248,61.595 81.828,64.175 81.828,64.811 81.851,64.834 U1.16
  Bottom Layer w0.8: P6.3 6.604,31.496 8.763,33.655 15.875,33.655 19.685,37.465 26.924,37.465 32.131,42.672 R11.1@32.131,45.442
o3: U1.9 U2.7 | length 4.4
  Top Layer w0.5: U2.7 80.167,72.136 81.609,70.693 81.609,70.457 U1.9@82.278,70.457
o4: U1.10 U2.6 | length 4
  Top Layer w0.5: U2.6 78.722,70.819 79.93,70.819 81.105,69.644 82.159,69.644 U1.10
o5: U1.11 U2.5 | length 3.8
  Top Layer w0.5: U2.5 78.722,69.549 79.93,69.549 80.635,68.844 82.159,68.844 U1.11
o6: U1.12 U2.4 | length 3.6
  Top Layer w0.5: U2.4 78.725,68.276 79.806,68.276 80.058,68.024 82.159,68.024 U1.12
o7: U1.13 U2.3 | length 3.6
  Top Layer w0.5: U2.3 78.725,67.106 79.596,67.106 79.703,67.213 81.563,67.213 81.574,67.224 82.159,67.224 U1.13
o8: U1.14 U2.2 | length 3.8
  Top Layer w0.5: U2.2 78.725,65.836 79.933,65.836 80.531,66.434 U1.14
o13: P1.2 U2.10 | length 5.5
  Top Layer w0.5: P1.2 69.051,73.443 70.067,73.443 71.374,72.136 U2.10
o14: P1.3 U2.11 | length 5
  Top Layer w0.5: P1.3 69.105,71.12 69.359,70.866 U2.11
o15: P1.4 U2.12 | length 5.3
  Top Layer w0.5: P1.4 69.083,68.829 69.845,68.829 70.612,69.596 U2.12
o16: P1.5 U2.13 | length 5.8
  Top Layer w0.5: P1.5 69.302,66.04 69.773,66.511 69.813,66.511 71.628,68.326 U2.13
o17: P1.6 U2.14 | length 6.4
  Top Layer w0.5: P1.6 69.088,63.5 72.594,67.006 73.675,67.006 U2.14
o18: P1.7 U2.15 | length 7.6
  Top Layer w0.5: P1.7 69.215,60.96 71.374,63.119 71.374,64.389 72.721,65.736 U2.15@73.675,65.736
q1: P6.5 P7.5 U1.31 U4.19 | length 34
  Top Layer w0.5: P7.5@88.9,57.277 88.9,59.944 87.63,61.214 87.63,68.199 89.065,69.634 U1.31
  Bottom Layer w0.8: P6.5 6.694,36.576 7.329,37.211 15.24,37.211 18.161,40.132 20.701,40.132 21.745,41.176 21.745,42.648 U4.19@21.795,42.697
q2: P6.4 P7.4 U1.30 U4.20 | length 36.6
  Top Layer w0.5: U1.30 90.559,68.824 89.708,68.824 88.9,68.017 88.9,65.532 88.39,65.022 88.39,62.232 91.44,59.182 P7.4
  Bottom Layer w0.8: P6.4 6.556,34.036 7.953,35.433 15.621,35.433 18.923,38.735 21.717,38.735 23.749,40.767 U4.20@23.749,42.671
q3: P7.3 U1.24 | length 8
  Top Layer w0.5: U1.24@89.192,63.087 89.821,63.087 93.731,59.177 93.731,57.526 P7.3@93.858,57.399
q4: P7.2 U1.25 | length 10.1
  Top Layer w0.5: U1.25@90.569,64.855 91.035,64.855 91.079,64.811 91.079,63.48 96.271,58.288 96.271,57.526 P7.2@96.398,57.399
q11: J4.1 K1.3 | length 21.7
  Bottom Layer w3: J4.1@30.943,66.067 30.943,64.561 39.116,56.388 39.116,48.133 K1.3
q12: J2.1 K3.3 | length 14.6
  Bottom Layer w3: K3.3@6.731,59.182 12.755,59.182 17.78,63.666 J2.1@17.78,65.532
rst: P2.4 U1.29 U4.1 | length 3.9
  Top Layer w0.5: U1.29 90.579,68.044 91.164,68.044 91.175,68.055 91.931,68.055 92.334,68.458 93.76,68.458 P2.4@94.107,68.805
s1: J1.1 P4.2 | length 4
  Bottom Layer w1: P4.2@11.303,62.357 P4.2 12.159,63.348 12.159,65.626 J1.1
s2: J1.2 P4.1 | length 3.7
  Bottom Layer w1: P4.1@8.763,62.357 8.859,62.453 8.859,65.755 J1.2
VCC: D1.2 D2.2 K1.4 K3.5 P1.1 P6.8 P7.8 PS1.4 R10.1 R10.2 U2.9 U3.3 | length 61
  Top Layer w0.5: P1.1 68.853,76.181 70.265,76.181 73.025,73.421 75.042,73.421 75.819,72.644 75.819,63.881 73.445,61.507 72.556,61.507 R10.2
  Top Layer w1: R10.1@76.833,56.769 80.421,56.769 80.449,56.797 81.054,56.797 P7.8@81.407,57.15
  Bottom Layer w1: P6.8 9.731,44.196 10.199,43.728 10.605,43.728 PS1.4@10.753,43.876 ; U3.3 10.753,49.008 PS1.4@10.753,43.876 ; K3.5@19.177,59.944 14.351,55.637 14.351,49.022 14.337,49.008 14.337,47.46 PS1.4@10.753,43.876 ; K1.4 26.575,59.61 26.575,58.134 D1.2@28.575,56.134
vesp: C3.1 C4.1 C5.1 P6.1 P6.7 P7.1 P7.7 R2.1 R3.1 R4.1 R5.1 R6.1 R7.1 R8.1 R9.1 U1.4 U1.6 U1.18 U3.2 U3.4 U4.3 U4.8 | length 114
  Top Layer w0.5: R3.1@64.77,56.388 68.707,56.388 73.533,56.388 75.565,58.42 78.486,58.42 79.248,59.182 84.348,59.182 ; P7.7@83.693,57.421 84.348,58.076 84.348,59.182 ; U1.18@84.348,63.484 84.348,59.182 ; U1.18 84.359,63.444 84.359,64.029 84.348,64.04 84.348,64.307 84.328,64.327 84.328,66.802 85.179,67.653 85.179,71.824 U1.6 85.169,72.398 85.19,72.419 85.19,73.113 85.483,73.406 86.476,73.406 86.769,73.113 U1.4@86.769,71.707
  Top Layer w1: P7.1 99.06,57.566 100.33,58.836 C5.1
  Bottom Layer w0.5: 6.223,24.595 P6.1
  Bottom Layer w1: U3.4@4.064,51.082 4.064,41.656 ; P6.7 4.064,41.656 ; U4.8@13.845,26.933 13.845,26.504 13.843,26.502 13.843,24.595 ; U4.3@23.876,26.741 23.876,25.181 23.29,24.595 13.843,24.595 ; 4.064,41.656 4.064,25.181 4.65,24.595 6.223,24.595 13.843,24.595
pads on no net: JP1.1 JP1.2 P9_1.1 P9_1.2 P9_1.3 P9_2.1 P9_2.2 P9_2.3 P9_3.1 P9_3.2 P9_3.3 R12_1.1 R12_1.2 R12_2.1 R12_2.2 R12_3.1 R12_3.2 R13_1.1 R13_1.2 R13_2.1 R13_2.2 R13_3.1 R13_3.2 R14_1.1 R14_1.2 R14_2.1 R14_2.2 R14_3.1 R14_3.2 R15_1.1 R15_1.2 R15_2.1 R15_2.2 R15_3.1 R15_3.2 U1.19 U1.20 U2.16 U4.2 U4.17 U4.21 U4.22
copper on no net: | length 335.9
  Bottom Layer w0.254: 2.921,24.003 2.921,68.199 3.556,68.834 43.053,68.834 43.18,68.961 43.18,68.834 43.18,23.876 42.926,23.622 3.302,23.622 2.921,24.003 ; 143.256,-127.381 143.256,-120.142 143.51,-120.142 151.384,-120.142 151.384,-127.508 143.383,-127.508 143.256,-127.381 ; 147.447,-125.476 147.447,-118.237 147.701,-118.237 155.575,-118.237 155.575,-125.603 147.574,-125.603 147.447,-125.476 ; 155.194,-128.524 155.194,-121.285 155.448,-121.285 163.322,-121.285 163.322,-128.651 155.321,-128.651 155.194,-128.524
  Bottom Layer w0.5: 121.349,13.194 122.799,13.194 123.128,12.865 123.253,12.865 ; 121.412,63.804 122.863,63.804 123.192,63.474 123.317,63.474 ; 121.539,45.135 122.99,45.135 123.319,44.805 123.444,44.805 ; 123.253,11.62 124.079,11.62 ; 123.317,62.23 124.142,62.23 ; 123.444,43.561 124.269,43.561 ; 124.142,9.461 124.079,9.525 124.079,11.62 ; 124.206,60.071 124.142,60.134 124.142,62.23 ; 124.333,41.402 124.269,41.465 124.269,43.561 ; 124.904,11.62 124.079,11.62 ; 124.904,12.865 125.03,12.865 125.385,13.221 126.809,13.221 ; 124.968,62.23 124.142,62.23 ; 124.968,63.474 125.093,63.474 125.449,63.83 126.873,63.83 ; 125.095,43.561 124.269,43.561 ; 125.095,44.805 125.22,44.805 125.576,45.161 127,45.161
  Bottom Layer w1: 121.349,11.544 121.387,11.544 121.412,11.519 ; 121.412,62.154 121.45,62.154 121.475,62.129 ; 121.539,11.519 121.539,9.525 121.602,9.461 ; 121.539,43.485 121.577,43.485 121.602,43.46 ; 121.602,62.129 121.602,60.134 121.666,60.071 ; 121.73,43.46 121.73,41.465 121.793,41.402 ; 126.682,9.461 126.809,9.588 126.809,11.546 ; 126.682,11.546 126.708,11.571 126.809,11.571 ; 126.746,60.071 126.873,60.198 126.873,62.155 ; 126.746,62.155 126.771,62.18 126.873,62.18 ; 126.873,41.402 127,41.529 127,43.486 ; 126.873,43.486 126.898,43.511 127,43.511 ; 144.78,-125.984 144.876,-125.888 144.876,-124.033 145.265,-123.644 145.265,-123.519 145.29,-123.494 145.415,-123.494 ; 145.415,-121.844 149.074,-121.844 149.1,-121.87 149.225,-121.87 ; 147.32,-125.984 147.32,-123.52 ; 148.971,-124.079 149.067,-123.983 149.067,-122.128 149.456,-121.739 149.456,-121.614 149.481,-121.589 149.606,-121.589 ; 149.225,-123.52 149.35,-123.52 149.375,-123.545 149.375,-123.67 149.764,-124.06 149.764,-125.888 149.86,-125.984 ; 149.606,-119.939 153.265,-119.939 153.291,-119.965 153.416,-119.965 ; 151.511,-124.079 151.511,-121.615 ; 153.416,-121.615 153.541,-121.615 153.566,-121.64 153.566,-121.765 153.955,-122.155 153.955,-123.983 154.051,-124.079 ; 156.718,-127.127 156.814,-127.031 156.814,-125.176 157.203,-124.787 157.203,-124.662 157.228,-124.637 157.353,-124.637 ; 157.353,-122.987 161.012,-122.987 161.038,-123.013 161.163,-123.013 ; 159.258,-127.127 159.258,-124.663 ; 161.163,-124.663 161.288,-124.663 161.313,-124.688 161.313,-124.813 161.702,-125.203 161.702,-127.031 161.798,-127.127

## Polygon pours and split planes (outlines as drawn)
faz on Bottom Layer "NONET_L02_P003" (solid, shelved, pour order 3): 1.397,63.5 12.7,63.5 12.7,57.277 11.303,55.88 1.524,55.88 1.524,63.627
no net on Bottom Layer "NONET_L02_P001" (solid, pour order 1): 6.985,67.691

## Keep-outs
Keep-Out Layer:
  lines w1: 0,-0.381 0,22.86 0,67.945 0,85 150,85 150,0 0,0

## Other copper
Bottom Layer:
  region: 38.989,30.607 40.259,29.337 42.037,29.337 42.037,29.591 42.926,30.48 42.926,31.75 42.418,32.258 41.402,32.258 40.259,31.115 38.989,31.115
  region: 39.37,31.115
  region: 43.116,27.749 43.116,24.828 42.608,24.32 40.957,24.32 40.576,24.701 40.576,27.877
  region net vesp: 4.191,27.051 6.477,27.051 6.477,24.849 6.223,24.595 6.18,24.638 4.318,24.638
  region net q12: 15.748,67.945 16.256,68.453 20.32,68.453 15.748,63.647
  region net NetD1_1: 28.956,51.181 29.591,51.816 30.226,51.816 30.226,49.443 28.154,49.443
  region net VCC: 26.162,57.912 25.273,58.801 25.273,59.182 25.4,59.182 26.924,60.706 27.432,60.198 27.432,59.182 30.353,56.261 30.353,54.991 30.099,54.737 28.702,54.737 28.321,55.118 28.321,55.645
  region net q12: 20.955,67.945 20.955,64.643 18.923,62.611 16.51,62.103 16.764,68.453 20.447,68.453
  region net faz: 27.051,64.643 27.051,62.484 25.4,62.484 24.384,61.468 21.463,61.468 21.463,62.738 23.368,64.643
  region: 25.019,66.929
  region net faz: 28.067,62.584 28.067,67.945 27.559,68.453 22.86,68.453 22.307,67.9 22.307,62.402
  region: 25.4,63.373
  region net q11: 35.433,62.62 35.433,67.818 34.869,68.382 30.028,68.382 29.591,67.945 29.591,63.881 32.004,61.468 34.455,61.468
  region net nol: 41.783,59.69 41.783,58.293 36.83,63.246 36.83,67.945 37.338,68.453 42.164,68.453 42.672,67.945 42.672,59.309 42.545,59.309 41.688,60.166
  region net nol: 39.243,62.611
  region: 25.273,28.384 26.289,28.384 26.289,25.971 26.543,25.717 26.543,24.32 26.289,24.066 25.273,24.066 25.019,24.32 25.019,25.717 25.273,25.971
  region net rst: 27.432,28.384 28.448,28.384 28.448,25.971 28.702,25.717 28.702,24.32 28.448,24.067 27.432,24.066 27.178,24.321 27.178,25.717 27.432,25.971
  region net nol: 38.862,38.185 38.862,44.069 39.37,44.577 40.513,44.577 41.783,45.847 42.164,45.466 42.164,40.687 42.498,40.687 42.672,40.513 39.751,37.592
  region net faz: 26.035,54.356 26.035,54.61 25.654,54.229 25.654,53.213 25.019,53.213 24.511,52.705 21.082,52.705 19.939,53.848 19.939,55.245 22.225,57.531 24.003,57.531 26.035,55.499 26.035,54.229
  region net VCC: 13.97,55.372 17.589,55.372 17.59,56.07 20.066,58.42 20.256,59.88 20.256,60.642 19.241,60.642
  region net vesp: 5.207,53.975 3.683,54.864 3.683,46.736 6.35,49.403

## Text inside footprints (layer, text, board x,y; h text height)
Q1: Bottom Overlay "*" at 31.722,47.26 h1.27
Q2: Bottom Overlay "*" at 23.218,49.563 h1.27 r90
U4: Mechanical 13 "CUTOUT POLYGON" at 35.211,27.174 h0.25 r270; Mechanical 13 "ANTENNA AREA" at 35.719,27.174 h0.25 r270